# Altium PCB ROBOTPCB.PcbDoc
Units mm, origin at the board's own origin, x right, y up, seen from the top; angles counter-clockwise.
Board outline 178.3 x 103.75 mm, 2 copper layers (Top Layer, Bottom Layer); 68 components, 56 nets, 292 pads, 71 vias.
Unrouted connection lines stored in the file: 24.
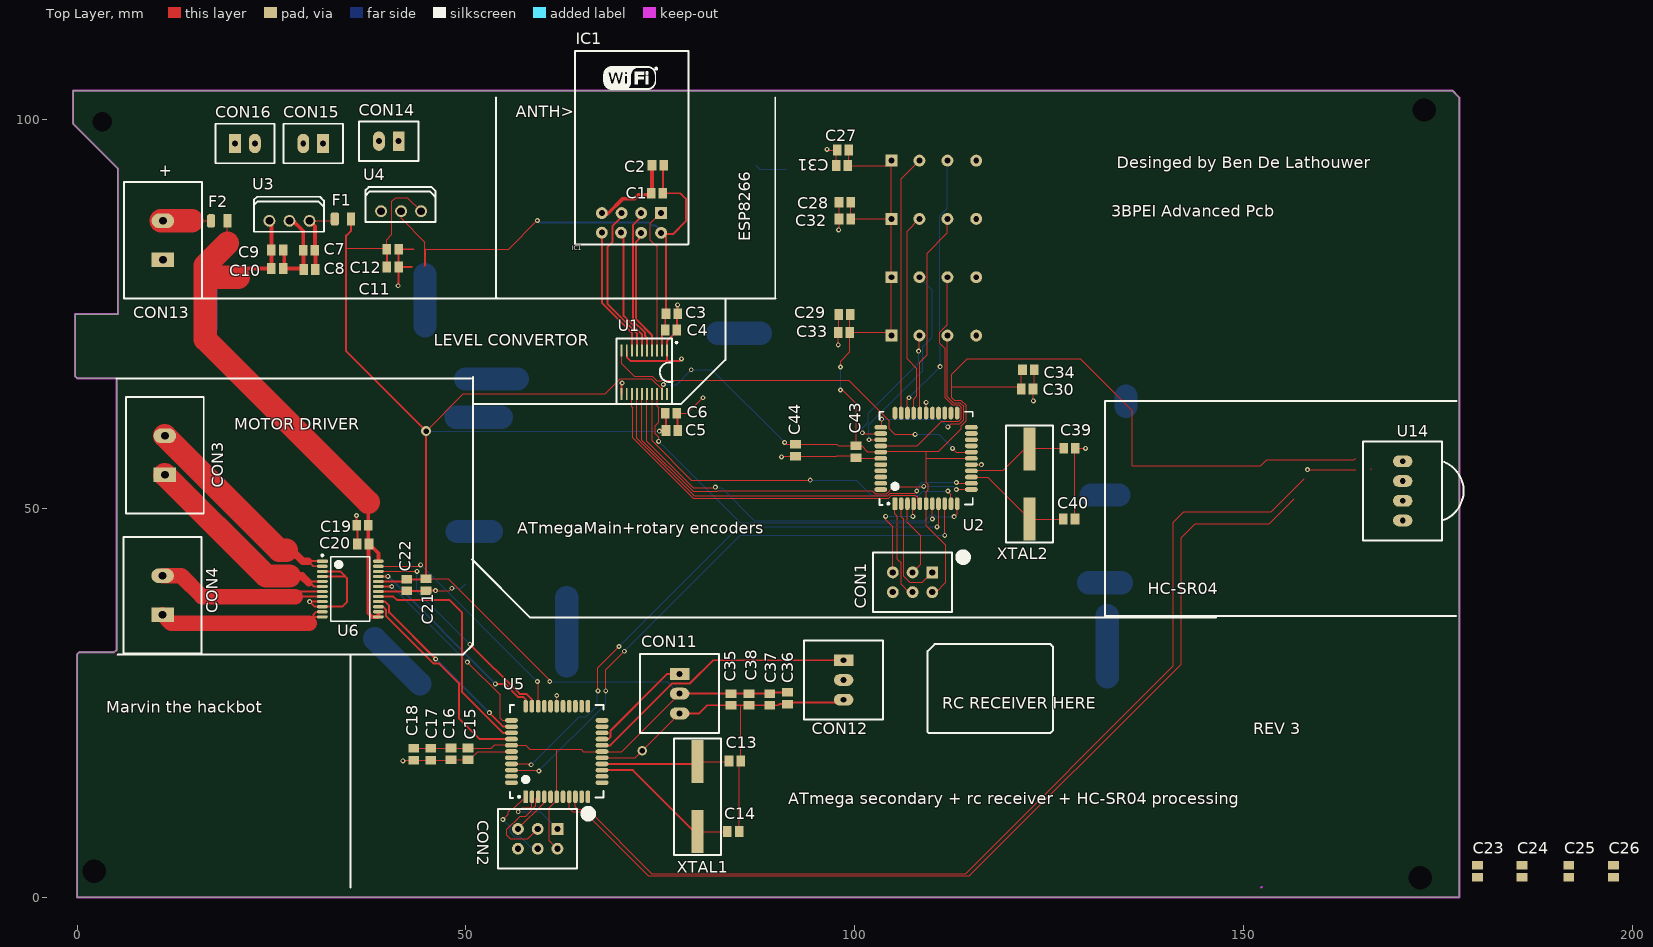
[diagram p0: Top Layer view]
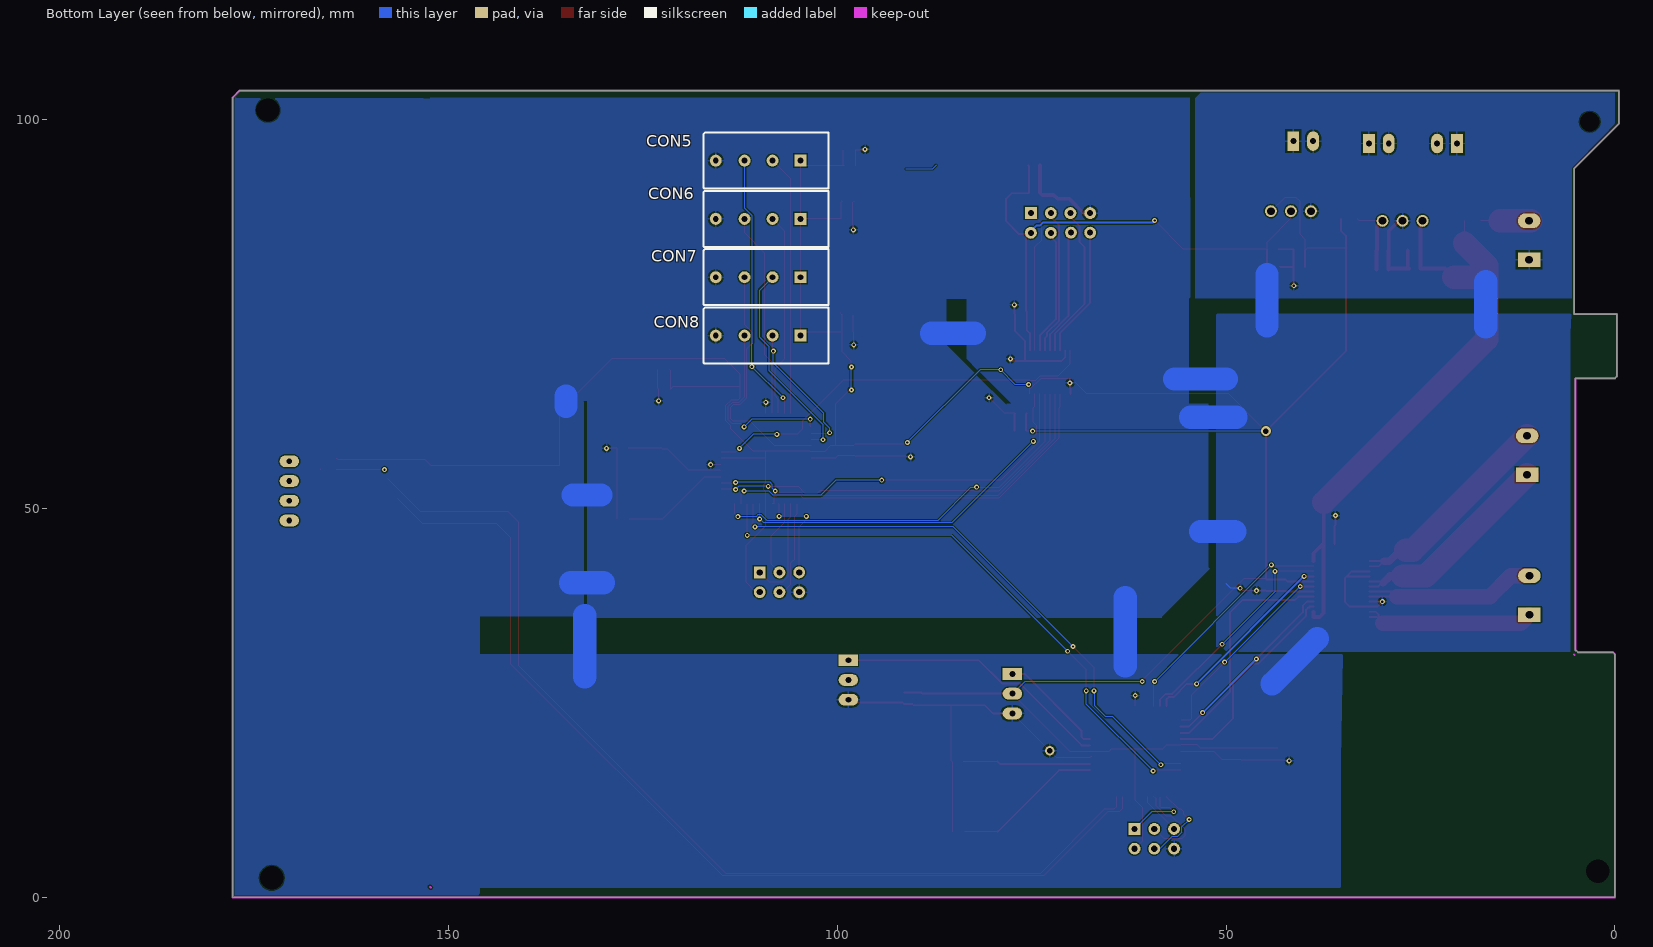
[diagram p1: Bottom Layer view, seen from below]

## Layer stack, top to bottom
Top Solder: solder mask 0.0102, Solder Resist, Dk 3.5
Top Layer: signal copper 0.0356
Dielectric 1: dielectric 0.32, FR-4, Dk 4.8
Bottom Layer: signal copper 0.0356
Bottom Solder: solder mask 0.0102, Solder Resist, Dk 3.5

## Board outline
0,0 0,31.25 0.25,31.5 4.75,31.5 5.1,31.85 5.1,66.75 0,66.75 -0.25,67 -0.25,75 5.25,75 5.25,93.75 -0.5,99.5 -0.5,103.75 176.9,103.75 177.8,102.85 177.8,0

## Design rules (kind name [scope] priority, off if disabled: settings)
AssemblyTestPointUsage SilkToBoardRegionClearance_1 [All] p2:
Clearance [All] p1: gap=0.152 ignorepadtopadclearanceinfootprint=FALSE except(0: Arc-Hole Track-Hole SMDPad-Hole THPad-Hole Via-Hole Fill-Hole Poly-Hole Region-Hole Text-Hole)
MatchedLengths DiffPair_DIFF100MatchedLengths [InDifferentialPairClass('DIFF100')] p1: tolerance=0.152 checknetsindiffpair=TRUE checkdiffpairvsdiffpair=FALSE checkxsignals=FALSE checkothers=FALSE
MinimumSolderMaskSliver SilkscreenOverComponentPads_1 [All] p2: minsoldermaskwidth=0.254
MinimumSolderMaskSliver SilkToSolderMaskClearance [IsPad] p3: minsoldermaskwidth=0.254
MinimumSolderMaskSliver SilkscreenOverComponentPads [All] p4: minsoldermaskwidth=0.254
PolygonConnect [All] p1: connectstyle=Relief reliefconductorwidth=0.254 reliefentries=4 polygonreliefangle="90 Angle" airgapwidth=0.254
RoutingVias [All] p1: holewidth=0.305 width=0.635 viastyle="Through Hole" minholewidth=0.305 minwidth=0.635 maxholewidth=0.711 maxwidth=1.27
SilkToSolderMaskClearance SilkToSolderMaskClearance_1 [IsPad] p1: minsilkscreentomaskgap=0.254 clearancetoexposedcopper=TRUE
SolderMaskExpansion [All] p1: expansion=0.102
Width [All] p1: maxlimit=5 minlimit=0.152 preferedwidth=0.254
29 further rules are at their usual default settings.

## Classes and differential pairs
component class U_Voeding: C7 C8 C9 C10 C11 C12 C15 C16 CON13 CON14 CON15 CON16 F1 F2 U3 U4
component class U_motordriver: C17 C18 C19 C20 U6
component class U_LevelShifter: C3 C4 C5 C6 U1
component class U_ESP8266: C1 C2 IC1
component class "U_RC reciever": C31 C32 C33 C34 CON11 CON12
component class "U_Atmega secondary": C13 C14 C27 C28 C29 C30 CON2 U5 XTAL1
component class U_ATmegaMain: C35 C36 C39 C40 C43 C44 CON1 U2 XTAL2
component class Top: CON3 CON4
component class "U_ultrasoon sensor": C37 C38 U14
component class U_encoder: C21 C22 C23 C24 C25 C26 CON5 CON6 CON7 CON8

## Components (designator, comment, footprint, x,y, rotation, side; value= is the part's Value field where it differs from the comment)
C1 "Cap Pol3" C0805 74.6,90.55 r180 top
C2 "Cap Pol3" C0805 74.7,94.15 r180 top
C3 "Cap Pol3" C0805 76.5,75.05 r0 top
C4 "Cap Pol3" C0805 76.4,72.95 r0 top
C5 "Cap Pol3" C0805 76.5,60.05 r0 top
C6 "Cap Pol3" C0805 76.4,62.25 r0 top
C7 "Cap Pol3" C0805 29.85,83.225 r180 top
C8 "Cap Pol3" C0805 29.9,80.75 r180 top
C9 "Cap Pol3" C0805 25.75,83.25 r0 top
C10 "Cap Pol3" C0805 25.75,80.85 r0 top
C11 "Cap Pol3" C0805 40.6,83.35 r0 top
C12 "Cap Pol3" C0805 40.6,81.05 r0 top
C13 "Cap Pol3" C0805 84.6,17.55 r0 top
C14 "Cap Pol3" C0805 84.4,8.45 r0 top
C15 "Cap Pol3" C0805 50.3,18.45 r270 top
C16 "Cap Pol3" C0805 48.1,18.45 r270 top
C17 "Cap Pol3" C0805 45.5,18.4 r270 top
C18 "Cap Pol3" C0805 43.3,18.4 r270 top
C19 "Cap Pol3" C0805 36.7,47.85 r180 top
C20 "Cap Pol3" C0805 36.8,45.45 r180 top
C21 "Cap Pol3" C0805 44.9,40.2 r270 top
C22 "Cap Pol3" C0805 42.4,40.15 r270 top
C23 "Cap Pol3" C0805 180.099,3.349 r90 top
C24 "Cap Pol3" C0805 185.849,3.349 r90 top
C25 "Cap Pol3" C0805 191.849,3.349 r90 top
C26 "Cap Pol3" C0805 197.599,3.349 r90 top
C27 "Cap Pol3" C0805 98.5,96.1 r180 top
C28 "Cap Pol3" C0805 98.75,89.4 r180 top
C29 "Cap Pol3" C0805 98.7,74.95 r180 top
C30 "Cap Pol3" C0805 122.2,65.35 r0 top
C31 "Cap Pol3" C0805 98.4,94.1 r180 top
C32 "Cap Pol3" C0805 98.75,87.25 r180 top
C33 "Cap Pol3" C0805 98.65,72.65 r180 top
C34 "Cap Pol3" C0805 122.35,67.85 r0 top
C35 "Cap Pol3" C0805 84.1,25.45 r270 top
C36 "Cap Pol3" C0805 91.4,25.6 r270 top
C37 "Cap Pol3" C0805 89.1,25.45 r270 top
C38 "Cap Pol3" C0805 86.4,25.45 r270 top
C39 "Cap Pol3" C0805 127.65,57.75 r0 top
C40 "Cap Pol3" C0805 127.6,48.65 r0 top
C43 "Cap Pol3" C0805 100.2,57.3 r270 top
C44 "Cap Pol3" C0805 92.4,57.5 r270 top
CON1 "ISP Programming header" "ISP PROGRAMMING HEADER" 107.46,40.52 r180 top
CON2 "ISP Programming header" "ISP PROGRAMMING HEADER" 59.25,7.52 r180 top
CON3 "Schrew terminal" ScrewTerminal 11.3,56.85 r90 top
CON4 "Schrew terminal" ScrewTerminal 11,38.85 r90 top
CON5 "Encoder" ENCODER 104.75,94.75 r0 bottom
CON6 "Encoder" ENCODER 104.75,87.25 r0 bottom
CON7 "Encoder" ENCODER 104.75,79.75 r0 bottom
CON8 "Encoder" ENCODER 104.75,72.25 r0 bottom
CON11 "RCcon" RcCon 77.5,26.19 r270 top
CON12 "RCcon" RcCon 98.6,27.95 r270 top
CON13 "Schrew terminal" ScrewTerminal 11.05,84.5 r90 top
CON14 "2PinsHeader" 2PinsHeader 40.1,97.25 r180 top
CON15 "2PinsHeader" 2PinsHeader 30.37,96.95 r180 top
CON16 "2PinsHeader" 2PinsHeader 21.6,96.95 r0 top
F1 "fuse" Fuse 33.15,87.25 r0 top
F2 "fuse" Fuse 17.25,87 r0 top
IC1 "ESP8266 ESP-01" "ESP8266 ESP-01" 71.31,86.743 r0 top
U1 "TXb0108" TXB0108 75.9,70.35 r180 top
U2 "ATmega162" ATmga162 109.2,56.45 r90 top
U3 "LM78xx" LM78xx 24.15,87.9 r0 top
U4 "LD1117V33" LD117vxx 39.1,88.25 r0 top
U5 "ATmega162" ATmga162 61.7,18.75 r90 top
U6 "TB6612FGN" TBS6612FNG 35.15,39.65 r0 top
U14 "HC-SR04" ULTRASOONSENSOR 170.5,56.08 r270 top
XTAL1 "Crystal" Crystal 79.8,12.95 r270 top
XTAL2 "Crystal" Crystal 122.5,53.15 r270 top

## Footprints (in the part's own frame and the unit in brackets; to place one, negate y for a bottom-side part, rotate by r counter-clockwise, add the part's x,y. Pads: shape width x height; smd on the part's side, far side on the other; paste and mask are expansions set on the pad)
2PinsHeader [mil]
  rect 60x98.43 hole 30: 1(-50,0)
  oval 60x98.43 hole 30: 2(50,0)
  silkscreen extent -150,-100 150,100, body extent -101,-50 99,50, height 237
ATmga162 [mm] "ATmga162 TQPF"
  rrect50% 1.65x0.6 smd: 1(-5.825,4)
  oval 1.65x0.6 smd: 2(-5.825,3.2) 3(-5.825,2.4) 4(-5.825,1.6) 5(-5.825,0.8) 6(-5.825,0) 7(-5.825,-0.8) 8(-5.825,-1.6) 9(-5.825,-2.4) 10(-5.825,-3.2) 11(-5.825,-4) 23(5.825,-4) 24(5.825,-3.2) 25(5.825,-2.4) 26(5.825,-1.6) 27(5.825,-0.8) 28(5.825,0) 29(5.825,0.8) 30(5.825,1.6) 31(5.825,2.4) 32(5.825,3.2) 33(5.825,4)
  oval 0.6x1.65 smd: 12(-4,-5.825) 13(-3.2,-5.825) 14(-2.4,-5.825) 15(-1.6,-5.825) 16(-0.8,-5.825) 17(0,-5.825) 18(0.8,-5.825) 19(1.6,-5.825) 20(2.4,-5.825) 21(3.2,-5.825) 22(4,-5.825) 34(4,5.825) 35(3.2,5.825) 36(2.4,5.825) 37(1.6,5.825) 38(0.8,5.825) 39(0,5.825) 40(-0.8,5.825) 41(-1.6,5.825) 42(-2.4,5.825) 43(-3.2,5.825) 44(-4,5.825)
  silkscreen extent -6,-6 6,6, body extent -6,-6 6,6, height 1.1
C0805 [mm] "Chip Capacitor, Body 2.0x1.3mm, IPC High Density"
  rect 1.1x1.4 smd: 1(-0.75,0) 2(0.75,0)
  body extent -1.1,-0.72 1.1,0.72, height 1.4
Crystal [mm]
  rect 5.5x1.5 smd: 1(-4.5,0) 2(4.5,0)
  silkscreen extent -7.5,-3 7.5,3, body extent -6.35,-2.15 6.35,2.55, height 4.2
ENCODER [mil]
  rect 60x60 hole 30: 1(0,0)
  round 60 hole 30: 2(141.73,0) 3(283.46,0) 4(429.13,0)
  silkscreen extent -142,-142 492,142, body extent -12,-12 441,20, height 118
"ESP8266 ESP-01" [mil] "ESP8266 ESP-01"
  rect 60x60 hole 30: 1(149,50.5)
  round 60 hole 30: 2(150,-50.5) 3(49,49.5) 4(49,-50.5) 5(-50,49.5) 6(-53,-49.5) 7(-150,49.5) 8(-150,-49.5)
  silkscreen extent -287,-110 288,870, body extent -285,-105 285,871, height 231
Fuse [mm]
  rrect50% 1.05x1.7 smd: 1(0,0)
  rect 1.05x1.7 smd: 2(2.1,0)
  body extent -0.52,-0.8 2.73,0.8, height 0.5
"ISP PROGRAMMING HEADER" [mil]
  rect 60x60 hole 31.5: 1(-100,-50)
  round 60 hole 31.5: 2(-100,50) 3(0,-50) 4(0,50) 5(100,-50) 6(100,50)
  silkscreen extent -200,-150 200,150, body extent -150,-100 150,100, height 315
LD117vxx [mil] "TO-220"
  round 60 hole 38.98: 1(0,0) 2(101.38,0) 3(202.76,0)
  silkscreen extent -79,-55 276,122, body extent -99,-55 301,125, height 769
LM78xx [mm]
  round 1.524 hole 0.99: 1(0.6,-0.9) 2(3.175,-0.9) 3(5.75,-0.9)
  silkscreen extent -1.4,-2.3 7.6,2.2, body extent -1.91,-2.3 8.25,2.27, height 19.54
RcCon [mil]
  rect 60x98.43 hole 30: 1(-100,0)
  oval 60x98.43 hole 30: 2(0,0) 3(100,0)
  silkscreen extent -200,-200 200,200, body extent -150,-48 150,52, height 374
ScrewTerminal [mm]
  rect 1.9x2.9 hole 1: 1(-2.5,0)
  oval 1.9x2.9 hole 1: 2(2.5,0)
  silkscreen extent -7.5,-5 7.5,5, body extent -4.96,-4.41 5.04,4.59, height 15.3
TBS6612FNG [mm] "TBS6612FNG SSOP"
  rrect50% 1.4x0.4 smd: 1(-3.6,3.575)
  oval 1.4x0.4 smd: 2(-3.6,2.925) 3(-3.6,2.275) 4(-3.6,1.625) 5(-3.6,0.975) 6(-3.6,0.325) 7(-3.6,-0.325) 8(-3.6,-0.975) 9(-3.6,-1.625) 10(-3.6,-2.275) 11(-3.6,-2.925) 12(-3.6,-3.575) 13(3.6,-3.575) 14(3.6,-2.925) 15(3.6,-2.275) 16(3.6,-1.625) 17(3.6,-0.975) 18(3.6,-0.325) 19(3.6,0.325) 20(3.6,0.975) 21(3.6,1.625) 22(3.6,2.275) 23(3.6,2.925) 24(3.6,3.575)
  silkscreen extent -3.72,-4.15 2.5,4.45, body extent -4.05,-4.31 3.85,4.32, height 1.98
TXB0108 [mm] "TSSOP"
  rrect50% 0.25x1.55 smd: 1(0,0)
  rect 0.25x1.55 smd: 2(0.65,0) 3(1.3,0) 4(1.95,0) 5(2.6,0) 6(3.25,0) 7(3.9,0) 8(4.55,0) 9(5.2,0) 10(5.85,0) 11(5.85,5.6) 12(5.2,5.6) 13(4.55,5.6) 14(3.9,5.6) 15(3.25,5.6) 16(2.6,5.6) 17(1.95,5.6) 18(1.3,5.6) 19(0.65,5.6) 20(0,5.6)
  silkscreen extent -1.3,-1.55 6.5,6.9, body extent -0.37,-0.47 6.23,6.08, height 1.2
ULTRASOONSENSOR [mil]
  oval 60x98.43 hole 30: 1(0,0) 2(100,0) 3(200,0)
  oval 59.06x98.43 hole 30: 4(300,0)
  silkscreen extent -100,-200 400,308, body extent -20,-20 320,20, height 118

## Part data
C1 C2 C3 C4 C5 C6 C7 C8 C9 C10 C11 C12 C13 C14 C15 C16 C17 C18 C19 C20 C21 C22 C23 C24 C25 C26 C27 C28 C29 C30 C31 C32 C33 C34 C35 C36 C37 C38 C39 C40 C43 C44: "Polarized Capacitor (Surface Mount)"
CON11 CON12: library part "Rc con"
F1 F2: library part Component_1, "fuse ptc"

## Free pads (board coordinates)
  round 1.524 hole 2.5: 3(3.25,99.75)
  round 1.524 hole 3: 4(2.2,3.35) 5(172.75,2.5) 7(173.25,101.25)

## Via types
v1: diameter 0.635, hole 0.305, Top Layer to Bottom Layer, 69 vias
v2: diameter 1.27, hole 0.711, Top Layer to Bottom Layer, 2 vias

## Nets (pads, with @x,y where several pads share a name; then routed paths per layer and width w, separated by ;. In a path a pad name is that pad's centre, name@x,y a point inside that pad or via, vN(x,y) a via of type N, cw(c..) or ccw(c..) an arc to the next point about the centre after c; other vN are vias at no path point)
+3.3V: C1.1 C2.1 C3.1 C4.1 C15.1 C16.1 IC1.2 U1.2 U4.2 | length 70
  Top Layer w0.152: U4.2 41.675,87.325 44.75,84.25 44.75,83.35 55.5,83.35 v1(59.2,87.05) ; 44.65,81.15 44.75,81.25
  Top Layer w0.25: 44.75,81.25 44.75,83.35 ; U1.2 75.25,72.55 C4.1 75.65,75.35 75.75,75.45 75.75,85.025 75.465,85.31 76.66,85.31 78.3,86.95 78.3,89.85 77.6,90.55 C1.1 75.35,94.05 C2.1
  Bottom Layer w0.25: v1(59.2,87.05) 59.439,86.811 73.539,86.811 73.925,86.425 74.35,86.425 IC1.2@75.465,85.31
+5V: C5.1 C6.1 C11.1 C12.1 C19.1 C20.1 C21.1 C22.1 C23.1 C24.1 C25.1 C26.1 C27.1 C28.1 C29.1 C30.1 C31.1 C32.1 C33.1 C34.1 C35.1 C36.1 C37.1 C38.1 C43.1 C44.1 CON1.2 CON2.2 CON5.1 CON6.1 CON7.1 CON8.1 CON11.2 F1.2 U1.19 U2.6 U2.17 U2.38 U4.3 U5.6 U5.17 U5.38 U6.20 | length 465
  Top Layer w0.152: 34.6,83.5 39.6,83.5 C11.1@39.85,83.25 ; C11.1 39.85,84.6 40.5,85.25 40.5,89.5 41,90 42.5,90 U4.3 ; 43.3,19.15 48.05,19.15 48.1,19.2 53.25,19.2 53.7,19.65 55.775,19.65 U5.38 57.7,19.55 58.195,19.055 61.7,19.055 ; C21.1 47.772,40.95 60.8,27.922 v1(60.8,27.75) ; v2(44.9,59.95) 49.7,64.75 67.928,64.75 69.874,66.696 73.877,66.696 U1.19@75.25,65.323 ; CON2.2 60.75,7.29 60.75,11.502 61.7,12.452 U5.6 61.7,19.055 ; v1(74.9,59.95) 75.65,59.95 C5.1 ; U1.19 U1.19@75.25,65.323 ; v1(75.4,65.95) 75.25,65.8 U1.19@75.25,65.323 ; CON11.2 70.06,18.75 U5.17 65.131,18.75 64.826,19.055 61.7,19.055 ; v1(91,58.5) 91.25,58.25 C44.1 97.65,58.25 97.7,58.3 97.95,58.05 C43.1 ; v1(98.2,65.25) 98.4,65.25 100.2,63.45 C43.1 ; v1(98.2,68.2) 98.2,68.95 99.4,70.15 C33.1 ; C27.1 99.25,94.2 C31.1 104.1,94.1 CON5.1 CON6.1 CON7.1 CON8.1 104.35,72.65 C33.1 ; C28.1@99.45,89.65 99.35,89.55 C28.1 C32.1 CON6.1@104.4,87.25 ; C29.1@99.65,75.15 C29.1 99.4,74.9 C33.1 ; CON1.2 110.5,39.25 111.75,40.5 111.75,45.25 109.2,47.8 U2.6 109.2,52.178 109.446,52.424 109.446,53.076 109.2,53.322 109.2,56.45 ; U2.17 109.2,56.45 ; C34.1 121.45,67.7 C30.1 121.15,65.65 112.5,65.65 ; 164.45,56.5 164.2,56.25 153,56.25 152.25,55.5 135.7,55.5 135.7,62.55 129.009,69.241 115.843,69.241 115.853,69.25 114.5,69.25 112.5,67.25 112.5,65.65 ; C43.1 100.9,58.05 101.621,57.329 103.375,57.329 U2.38 103.475,57.35 109.9,57.35 ; 109.2,56.45 109.2,57.35 109.9,57.35 ; 109.9,57.35 110.8,57.35 113.729,60.279 113.729,60.669 114.338,61.279 114.338,63.271 113.668,63.942 112.806,63.942 112.5,64.248 112.5,65.65
  Top Layer w0.25: F1.2 35.25,85.75 34.6,85.1 34.6,83.5 34.6,70.25 v2(44.9,59.95) C21.1 44.85,40.9 C22.1 42.125,40.625 U6.20 ; C12.1 C11.1@39.85,83.25 ; C6.1 75.75,62.15 C5.1 ; CON11.2 84.09,26.19 C35.1 C38.1 C37.1 89.25,26.35 C36.1
  Bottom Layer w0.152: v2(44.9,59.95) v1(74.9,59.95) ; v1(60.8,27.75) 75.94,27.75 CON11.2 ; v1(75.4,65.95) 77.1,65.95 v1(79,67.85) 81.65,67.85 v1(91,58.5) ; v1(98.2,65.25) v1(98.2,68.2)
GND: C1.2 C2.2 C3.2 C4.2 C5.2 C6.2 C7.2 C8.2 C9.2 C10.2 C11.2 C12.2 C13.2 C14.2 C15.2 C16.2 C17.2 C18.2 C19.2 C20.2 C21.2 C22.2 C23.2 C24.2 C25.2 C26.2 C27.2 C28.2 C29.2 C30.2 C31.2 C32.2 C33.2 C34.2 C35.2 C36.2 C37.2 C38.2 C39.2 C40.2 C43.2 C44.2 CON1.6 CON2.6 CON5.4 CON6.4 CON7.4 CON8.4 CON11.3 CON12.3 CON13.1 CON14.1 CON14.2 CON15.1 CON15.2 CON16.1 CON16.2 IC1.7 U1.1 U1.9 U1.11 U2.16 U2.28 U2.39 U3.2 U4.1 U5.16 U5.28 U5.39 U6.3 U6.4 U6.9 U6.10 U6.18 | length 263.6
  Top Layer w0.152: v1(41.3,78.65) v1@41.35,78.7 ; v1(41.9,17.55) 42,17.65 C18.2 C17.2 48.05,17.65 C16.2 C15.2 50.507,17.7 51.557,18.75 U5.39 ; 43.05,81.05 43.15,81.15 ; v1(46.1,39.45) 47.9,39.45 v1(48.2,39.75) ; U5.28 v1(61.7,25.95) ; U5.16@67.325,18.15 U5.16 71.8,17.95 CON11.3 ; 70.05,65.8 70.05,66.1 v1(70.1,66.15) ; 75.9,69.1 76,69 ; C6.2 78.5,62.25 v1(80.5,64.25) ; C14.2 85.15,17.35 C13.2 85.35,24.6 85.25,24.7 ; v1(90.6,56.65) 90.7,56.75 C44.2 97.65,56.75 97.7,56.8 99.95,56.8 C43.2 100.3,56.45 U2.39 ; v1(96.45,96.2) 96.55,96.1 C27.2 97.65,96 C31.2 ; C28.2@97.85,89.55 C28.2 C32.2 98,85.9 v1(97.95,85.85) ; v1(97.9,71.05) C33.2 97.95,72.7 C29.2 ; U2.28 v1(109.2,63.65) ; U2.16 v1(116.3,55.65) ; v1(123,63.85) 122.95,63.9 C30.2 123.1,65.5 C34.2 ; C40.2 128.35,57.7 C39.2 v1(129.7,57.75)
  Top Layer w0.25: U6.9 v1(29.925,38.025) 30.575,37.375 U6.10 34.125,37.375 34.7,37.95 34.7,41.05 34.475,41.275 ; U6.4 34.475,41.275 ; U6.3 33.825,41.925 34.475,41.275 ; v1(35.95,49.1) C19.2 36.05,47.75 C20.2 ; U6.18 42.325,39.325 C22.2 44.85,39.4 C21.2 v1(46.1,39.45) ; v1@41.35,78.7 C12.2 ; 43.05,81.05 C12.2 ; 43.25,83.35 C11.2 C12.2 ; U1.11 70.05,65.8 ; U1.9 70.7,69.45 71.15,69 76,69 77.5,69 v1(77.75,69.25) ; 75.9,69.1 U1.1 75.9,71.558 77.15,72.808 C4.2 77.15,74.95 C3.2 v1(77.25,76.2) ; C6.2 77.25,62.15 C5.2 ; CON11.3 80,23.65 81.05,24.7 C35.2 85.25,24.7 C38.2 C37.2 90.2,24.7 90.35,24.85 C36.2 91.6,25.05 98.24,25.05 CON12.3
  Top Layer w0.5: C9.2@26.65,83.225 26.65,81 C10.2 29.05,80.85 C8.2 29.15,83.175 C7.2 29.1,85.675 U3.2@27.65,87.125 ; IC1.7@67.845,87.85 68.2,87.85 70.2,89.85 71.7,89.85 72.2,90.35 73.65,90.35 C1.2 73.95,90.65 C2.2
  Bottom Layer w0.152: v1(48.2,39.75) 49.4,39.75 50,40.35
  Bottom Layer w3: 16.6,73.35 16.6,79.15 ; 38.3,33.25 44.1,27.45 ; 44.75,73.5 44.75,80.1 ; 48.75,61.75 54.55,61.75 ; 48.9,47.05 53.3,47.05 ; 50,66.65 56.6,66.65 ; 63,29.75 63,38.55 ; 82.4,72.55 87.9,72.55 ; 130.1,40.45 134.3,40.45 ; 130.4,51.75 134,51.75 ; 132.5,28.35 132.5,36.25 ; 134.9,63.15 134.9,64.45
  other v2: 72.7,18.85
MISO: CON2.1 U5.2 | length 9.2
  Top Layer w0.152: v1(56.75,11) 57.25,11.5 58.341,11.5 58.5,11.659 U5.2
  Bottom Layer w0.152: v1(56.75,11) 59.58,11 CON2.1
MISO1: CON1.1 U2.2 | length 14
  Top Layer w0.152: U2.2 106,48.953 106.305,48.649 106.305,41.32 107.125,40.5 108.71,40.5 CON1.1
MOSI: CON2.4 U5.1 | length 10.7
  Top Layer w0.152: v1(54.775,10) 55.454,10.679 55.454,10.976 55.774,11.296 56.071,11.296 U5.1
  Bottom Layer w0.152: v1(54.775,10) 55.719,9.056 55.719,8.38 56.3,7.799 56.976,7.799 58.525,6.25 CON2.4
MOSI1: CON1.4 U2.1 | length 12.6
  Top Layer w0.152: U2.1 105.2,49.3 105.5,49 105.5,43.5 106,43 106,40.25 107,39.25 CON1.4
NetC7_1: C7.1 C8.1 F1.1 U3.3 | length 9.9
  Top Layer w0.152: U3.3 32.9,87 F1.1 ; C7.1 C7.1@30.65,83.175
  Top Layer w0.5: U3.3 30.6,86.3 C7.1 ; C8.1 C7.1@30.65,83.175
NetCON3_1: CON3.1 U6.5 U6.6 | length 28
  Top Layer w0.25: U6.6 30.475,39.975 30,40.45 29.8,40.45 29.975,40.625 U6.5
  Top Layer w1: 27.3,41.327 28.923,41.327 29.8,40.45
  Top Layer w3: CON3.1 24.323,41.327 27.3,41.327
NetCON3_2: CON3.2 U6.1 U6.2 | length 29.3
  Top Layer w0.25: U6.2 30.375,42.575 29.725,43.225 U6.1
  Top Layer w1: 26.9,44.65 27.2,44.95 27.3,44.95 29.025,43.225 29.725,43.225
  Top Layer w3: CON3.2 26,44.65 26.9,44.65
NetCON4_1: CON4.1 U6.11 U6.12 | length 23.2
  Top Layer w0.25: 29.85,35.25 30.4,35.8 ; U6.12 30.675,36.075 30.4,35.8 ; U6.11 30.775,36.725 30.4,36.35 30.4,35.8
  Top Layer w2: CON4.1 12.1,35.25 29.85,35.25
NetCON4_2: CON4.2 U6.7 U6.8 | length 25.4
  Top Layer w0.25: U6.8 28.075,38.675 28.725,39.325 U6.7
  Top Layer w2: CON4.2 13.4,41.35 16.075,38.675 28.075,38.675
NetCON5_2: CON5.2 U2.32 | length 33.4
  Top Layer w0.152: U2.32 106,92.4 CON5.2
NetCON5_3: CON5.3 U2.31 | length 34.6
  Top Layer w0.152: U2.31 106.8,64.05 v1(107,64.25)
  Bottom Layer w0.152: v1(107,64.25) v1(111,68.25) 111,71.219 110.959,71.259 110.959,87.66 111.95,88.651 CON5.3
NetCON6_2: CON6.2 U2.30 | length 26.3
  Top Layer w0.152: U2.30 107.6,64.078 108,64.478 108,68 106.75,69.25 106.75,85.65 CON6.2
NetCON6_3: CON6.3 U2.29 | length 26.4
  Top Layer w0.152: U2.29 108.4,68.809 109.341,69.75 109.341,82.841 111.95,85.45 CON6.3
NetCON7_2: CON7.2 U2.36 | length 26.5
  Top Layer w0.152: v1(101.85,58.85) U2.36
  Bottom Layer w0.152: v1(101.85,58.85) 101.85,60.769 108.796,67.715 108.796,70.476 108.788,70.484 108.788,70.788 110,72 110,78.1 CON7.2
NetCON7_3: CON7.3 U2.37 | length 32.1
  Top Layer w0.152: U2.37 108.05,58.05 111.221,61.221 113.419,61.221 113.729,61.531 113.729,63.019 113.419,63.329 112.557,63.329 111.645,64.24 111.645,70.574 110.959,71.259 110.959,72.66 111.95,73.651 CON7.3
NetCON8_2: CON8.2 U2.35 | length 18
  Top Layer w0.152: v1(101,59.75) 101.1,59.65 U2.35 ; v1(108.25,70.25) 108.35,70.35 CON8.2
  Bottom Layer w0.152: v1(101,59.75) 101,60.35 101.75,61.1 101.75,62.25 108.25,68.75 v1(108.25,70.25)
NetCON8_3: CON8.3 U2.34 | length 24.6
  Top Layer w0.152: U2.34 103.5,60.575 v1(103.5,61.5) ; CON8.3 111.95,64.366 112.683,63.633 113.545,63.633 114.033,63.145 114.033,61.405 113.545,60.917 112.417,60.917 v1(112,60.5)
  Bottom Layer w0.152: v1(103.5,61.5) 111,61.5 v1(112,60.5)
NetCON11_1: CON11.1 U5.19 | length 13.9
  Top Layer w0.25: U5.19 68.3,20.35 68.627,20.677 68.627,21.452 75.905,28.73 CON11.1
NetCON12_1: CON12.1 U5.18 | length 35.6
  Top Layer w0.25: U5.18 68.6,19.55 76.55,27.5 78.837,27.5 81.827,30.49 CON12.1
NetCON13_2: CON13.2 F2.1 | length 6.4
  Top Layer w0.152: 14.75,87 F2.1
  Top Layer w3: CON13.2@10.8,87 CON13.2 14.75,87
NetIC1_1: IC1.1 U1.3 | length 18.6
  Top Layer w0.152: U1.3 74.6,83.65 73.75,84.5 73.75,86.681 IC1.1
NetIC1_3: IC1.3 U1.5 | length 18.8
  Top Layer w0.25: IC1.3 72.555,87.505 71.5,86.45 71.5,74.157 73.052,72.605 73.052,72.198 73.3,71.95 U1.5
NetIC1_4: IC1.4 U1.4 | length 16.2
  Top Layer w0.25: IC1.4@72.9,85.31 71.902,84.312 71.902,74.324 73.95,72.276 U1.4
NetIC1_5: IC1.5 U1.7 | length 19.9
  Top Layer w0.25: IC1.5 70.04,87.505 68.885,86.349 68.885,84.296 68.248,83.659 68.248,76.271 72,72.519 U1.7
NetIC1_6: IC1.6 U1.6 | length 16
  Top Layer w0.25: IC1.6@70.309,85.335 70.309,74.779 72.65,72.438 U1.6
NetIC1_8: IC1.8 U1.8 | length 16.7
  Top Layer w0.25: IC1.8@67.845,85.335 67.5,84.99 67.5,76.45 71.35,72.6 U1.8
NetU1_10: U1.10 U2.18 | length 52.1
  Top Layer w0.152: U1.10 70.05,68.6 71.649,67.001 74.003,67.001 74.554,66.45 75.128,66.45 75.174,66.496 99.276,66.496 104.454,61.318 104.454,60.274 105.178,59.55 v1(107.8,59.55) ; v1(112.6,57.75) 113.1,57.25 U2.18
  Bottom Layer w0.152: v1(107.8,59.55) 110.8,59.55 v1(112.6,57.75)
NetU1_13: U1.13 U2.7 | length 47
  Top Layer w0.152: U1.13 71.35,63.1 71.5,62.95 71.5,59.085 79.273,51.312 104.371,51.312 104.738,51.679 107.819,51.679 107.894,51.604 108.129,51.604 108.129,50.625 108.4,50.625
NetU1_14: U1.14 U2.10 | length 52.9
  Top Layer w0.152: U1.14 72,59.016 79.399,51.617 104.245,51.617 104.612,51.983 107.733,51.983 v1(108,52.25) ; v1(113.1,53.35) 113.2,53.25 115.025,53.25
  Bottom Layer w0.152: v1(108,52.25) 108.354,52.604 108.354,52.623 ; 108.354,52.624 108.354,53.076 108.674,53.396 113.054,53.396 v1(113.1,53.35)
NetU1_15: U1.15 U2.11 | length 51.8
  Top Layer w0.152: U1.15 72.65,58.797 79.243,52.204 82.326,52.204 82.41,52.288 102.264,52.288 102.631,51.921 104.119,51.921 104.993,52.796 108.846,52.796 v1(108.9,52.85) ; v1(113.1,52.45) 115.025,52.45
  Bottom Layer w0.152: v1(108.9,52.85) 112.7,52.85 v1(113.1,52.45)
NetU1_16: U1.16 U2.12 | length 52.2
  Top Layer w0.152: U1.16 73.254,64.704 73.254,58.624 79.228,52.65 82,52.65 v1(82.1,52.75) ; v1(112.8,48.95) 113.2,49.35 113.2,50.625
  Bottom Layer w0.152: v1(82.1,52.75) 82.2,52.65 82.9,52.65 87.096,48.454 109.032,48.454 109.774,49.196 110.226,49.196 110.472,48.95 v1(112.8,48.95)
NetU1_17: U1.17 U2.13 | length 49
  Top Layer w0.152: U1.17 73.95,58.7 79,53.65 v1(94.3,53.65) ; v1(112,52.25) 112.4,51.85 112.4,50.625
  Bottom Layer w0.152: v1(94.3,53.65) 100.2,53.65 102.146,51.704 108.226,51.704 108.772,52.25 v1(112,52.25)
NetU1_18: U1.18 U2.5 | length 48.5
  Top Layer w0.152: U1.18 74.6,63.15 74.8,62.95 74.8,61.122 74.354,60.676 74.354,59.596 74.8,59.15 v1(74.8,58.65) v1@75,58.65 ; v1(110,48.65) 110,50.625
  Bottom Layer w0.152: v1(74.8,58.65) 85.301,48.149 109.499,48.149 v1(110,48.65)
NetU2_8: U2.8 U5.41 | length 73.3
  Top Layer w0.152: U5.41 58.3,17.15 v1(58.4,17.05) ; v1(67,26.55) 67,29.55 v1(69.7,32.25) ; v1(110.6,47.65) 110.8,47.85 U2.8
  Bottom Layer w0.152: v1(58.4,17.05) 64.6,23.25 65.5,23.25 66.9,24.65 66.9,26.45 v1(67,26.55) ; v1(69.7,32.25) 85.1,47.65 v1(110.6,47.65)
NetU2_9: U2.9 U5.42 | length 75
  Top Layer w0.152: U5.42 59.3,16.35 v1(59.4,16.25) ; v1(68,26.55) 68,29.25 v1(70.4,31.65) ; v1(111.6,46.55) U2.9
  Bottom Layer w0.152: v1(59.4,16.25) 68,24.85 v1(68,26.55) ; v1(70.4,31.65) 85.3,46.55 v1(111.6,46.55)
NetU5_8: U5.8 U14.3 | length 127.9
  Top Layer w0.152: U5.8 63.3,11.45 63.75,11 65.225,11 73.475,2.75 114.75,2.75 142,30 142,46.25 143.82,48.07 153.32,48.07 156.54,51.29
NetU5_9: U5.9 U14.2 | length 130.4
  Top Layer w0.152: U5.9 64.1,11.65 64.445,11.305 65.695,11.305 73.945,3.055 114.305,3.055 141,29.75 141,48.25 142.36,49.61 153.61,49.61 157.83,53.83
NetU5_26: U5.26 U6.23
NetU5_32: U5.32 U6.22 | length 29
  Top Layer w0.152: U6.22 v1(43.725,41.925)
  Top Layer w0.25: v1(50.525,32.55) 56.925,26.15 57.8,26.15 58.5,25.45 U5.32
  Bottom Layer w0.152: v1(43.725,41.925) 43.725,39.35 v1(50.525,32.55)
NetU5_33: U5.33 U6.21 | length 26.4
  Top Layer w0.25: U6.21 v1(39.975,41.275) ; v1(53.8,27.45) 55.056,27.45 56.758,25.748 57.402,25.748 57.7,25.45 U5.33
  Bottom Layer w0.25: v1(39.975,41.275) 40.016,41.275 53.8,27.491 v1(53.8,27.45)
NetU5_34: U5.34 U6.19 | length 26
  Top Layer w0.152: v1(50.2,30.25) 54.4,26.05 54.4,23.05 54.7,22.75 U5.34
  Top Layer w0.25: U6.19 v1(40.475,39.975)
  Bottom Layer w0.152: v1(40.475,39.975) v1(50.2,30.25)
NetU5_35: U5.35 U6.16 | length 24.3
  Top Layer w0.25: U6.16 39.625,38.025 40.13,37.52 40.13,36.645 v1(46.125,30.65) ; v1(53.025,23.75) 54.825,21.95 U5.35
  Bottom Layer w0.25: v1(46.125,30.65) v1(53.025,23.75)
NetU5_36: U5.36 U6.17 | length 30.4
  Top Layer w0.25: U6.17 40.7,38.675 41.125,38.25 47.9,38.25 49.502,36.648 49.502,26.431 54.784,21.15 U5.36
NetU5_40: U5.40 U6.15
RESET: CON2.5 U5.4 | length 5.5
  Top Layer w0.152: CON2.5 60.1,12.18 U5.4
RESET1: CON1.5 U2.4 | length 12.9
  Top Layer w0.152: v1(104,49) 104,48.59 104.92,47.67 CON1.5 104.79,41.79 CON1.5@104.75,41.75 ; v1(107.5,49) 107.5,50.525 U2.4
  Bottom Layer w0.152: v1(104,49) v1(107.5,49)
SCK: CON2.3 U5.3 | length 11.8
  Top Layer w0.152: CON2.3 57.96,7.5 55.75,7.5 55.25,8 55.25,8.731 56.973,10.454 57.726,10.454 59.029,11.756 59.029,12.654 U5.3
SCK1: CON1.3 U2.3 | length 10
  Top Layer w0.152: U2.3 106.75,50.575 106.75,48.25 108.5,46.5 108.5,42.83 CON1.3
VMOT: C9.1 C10.1 C17.1 C18.1 F2.2 U3.1 U6.13 U6.14 U6.24 | length 81.1
  Top Layer w0.152: 16.5,81.25 18,79.75 ; 19.35,84.1 F2.2 ; 20.75,79.75 21.85,80.85 ; U3.1 U3.1@25,86.75
  Top Layer w0.5: 21.85,80.85 C10.1 C9.1 U3.1@25,86.75 ; 37.45,50.8 37.45,45.55 37.475,45.525 ; U6.14 U6.13 37.975,36.075 37.475,36.575 37.475,45.525 ; U6.24 38.75,44.25 37.475,45.525
  Top Layer w3: 18,79.75 20.75,79.75 ; 19.35,84.1 16.5,81.25 16.5,71.75 37.45,50.8
XTAL1: C13.1 U5.15 XTAL1.1 | length 16.5
  Top Layer w0.152: XTAL1.1@79.4,17.45 83.75,17.45 C13.1
  Top Layer w0.25: U5.15 79.1,17.15 XTAL1.1@79.4,17.45
XTAL2: C14.1 U5.14 XTAL1.2 | length 19.4
  Top Layer w0.152: XTAL1.2@79.4,8.45 C14.1
  Top Layer w0.25: U5.14 71.5,16.35 XTAL1.2@79.4,8.45
XTAL11: C39.1 U2.15 XTAL2.1 | length 13.1
  Top Layer w0.152: U2.15 115.125,54.95 119.1,54.95 121.8,57.65 XTAL2.1 122.6,57.75 C39.1
XTAL21: C40.1 U2.14 XTAL2.2 | length 14.1
  Top Layer w0.152: U2.14 117.1,54.05 XTAL2.2 C40.1
pads on no net: CON12.2 U1.12 U1.20 U2.19 U2.20 U2.21 U2.22 U2.23 U2.24 U2.25 U2.26 U2.27 U2.33 U2.40 U2.41 U2.42 U2.43 U2.44 U5.5 U5.7 U5.10 U5.11 U5.12 U5.13 U5.20 U5.21 U5.22 U5.23 U5.24 U5.25 U5.27 U5.29 U5.30 U5.31 U5.37 U5.43 U5.44 U14.1 U14.4
copper on no net: | length 67.8
  Top Layer w0.152: 38.75,42.575 44.025,42.575 v1(44.2,42.75) ; v1(59.2,27.75) 59.3,27.65 59.3,24.575 ; v1(158.25,55) 164.45,55 ; 166.45,55 166.45,55.101
  Top Layer w0.25: 38.75,37.375 39.275,37.375 39.316,37.335 39.26,37.279 39.452,37.279 39.727,37.004 39.727,36.206 45.879,30.055 46.595,30.055 49.1,27.55 49.1,23.05 51.8,20.35 55.875,20.35
  Bottom Layer w0.152: v1(44.2,42.75) v1(59.2,27.75) ; 87.3,94.15 87.8,93.65 91.2,93.65

## Polygon pours and split planes (outlines as drawn)
GND on Bottom Layer "Top Layer-No Net" (solid, pour order 57): 153.25,102.75 177.25,102.75 177.5,103 177.75,102.75 177.75,0 147,0 146.75,-0.25 146,0.5 146,102.5
GND on Bottom Layer "Top Layer-No Net" (solid, pour order 55): 152.4,63.85 152.55,64 177.75,64 177.75,37.25 176.75,36.25 152.25,36.25
GND on Bottom Layer "Top Layer-No Net" (solid, pour order 53): 5.65,75.05 51.15,75.05 51.25,74.95 51.25,32.25 50.55,32.25 49.9,31.55 47.65,31.55 5.75,31.55 5.75,72.55
GND on Bottom Layer "Top Layer-No Net" (solid, pour order 51): 35,31.25 146.5,31.25 146.5,1.25 35.2,1.25 35.3,1.35 35.3,17.55
GND on Bottom Layer "Top Layer-No Net" (solid, pour order 49): 132.6,63.75 132.7,63.85 152.4,63.85 152.4,36.25 152.3,36.15 132.6,36.15 132.6,63.85
GND on Bottom Layer "Top Layer-No Net" (solid, pour order 47): 89.8,102.85 152.4,102.85 152.4,63.85 132.2,63.85 132.2,36.075 132.1,35.975 58.275,35.975 58.275,36.075 52.1,42.25 52.3,42.45 52.3,63.45 78.2,63.45 78.3,63.35 86,71.05 86,77 89.85,77 89.8,77.05 89.8,102.85
GND on Bottom Layer "Top Layer-No Net" (solid, pour order 45): 54.8,76.95 83.4,76.95 83.4,69.25 77.6,63.45 54.8,63.45
GND on Bottom Layer "Top Layer-No Net" (solid, pour order 43): 54.7,102.85 89.8,102.85 89.8,76.95 54.8,76.95 54.6,77.15
GND on Bottom Layer "Top Layer-No Net" (solid, pour order 41): 53,103.75 54,102.75 54,77.05 5.25,77.05 5.25,93.75 0.1,99.45 0,99.55 0,103.75

## Keep-outs
Keep-Out Layer:
  lines w0.254: 5.2,31.15 5.3,31.25 ; 152.3,1.25 152.4,1.35 ; -0.5,99.5 -0.5,103.75 176.9,103.75 177.8,102.85 177.8,0 0,0 0,31.25 0.25,31.5 4.75,31.5 5.1,31.85 5.1,66.75 0,66.75 -0.25,67 -0.25,75 5.25,75 5.25,93.75 -0.5,99.5

## Silkscreen, mask and mechanical layers (free items; w line width, h text height)
Top Overlay:
  circle w1: c113.96,43.75 r0.5
  circle w1: c65.75,10.75 r0.5
  lines w0.254: 5.1,66.75 50.7,66.75 ; 5.3,31.25 49.7,31.25 50.9,32.45 50.9,66.95 ; 16.05,77 54.05,77 ; 35.2,1.25 35.2,1.95 35.2,31.25 ; 50.8,43.45 58.275,35.975 146.425,35.975 146.5,36.05 ; 50.9,63.45 69.4,63.45 ; 53.9,102.85 53.9,77.15 54.05,77 ; 76.55,63.45 77.7,63.45 83.2,68.95 83.4,69.15 ; 83.4,69.25 83.4,77 ; 89.8,102.85 89.8,77.05 89.85,77 54.05,77 ; 132.2,36.075 132.2,63.85 152.4,63.85 177.4,63.85 ; 132.275,36.15 152.4,36.15 177.35,36.15 ; 109.4,21.25 109.4,31.65 110.3,32.55 125.2,32.55 125.5,32.25 125.5,21.45 125.2,21.15 109.5,21.15 109.4,21.25
  text "ANTH>" at 56.4,100.35 h1.52
  text "Desinged by Ben De Lathouwer" at 133.75,93.75 h1.52
  text "+" at 10.5,92.75 h1.52
  text "3BPEI Advanced Pcb" at 133,87.5 h1.52
  text "ESP8266" at 86.6,84.35 h1.52 r90
  text "LEVEL CONVERTOR" at 45.9,70.95 h1.52
  text "MOTOR DRIVER" at 20.2,60.15 h1.52
  text "ATmegaMain+rotary encoders" at 56.6,46.75 h1.52
  text "HC-SR04" at 137.7,38.95 h1.52
  text "RC RECEIVER HERE" at 111.25,24.25 h1.52
  text "Marvin the hackbot" at 3.75,23.75 h1.52
  text "REV 3" at 151.25,21 h1.52
  text "ATmega secondary + rc receiver + HC-SR04 processing" at 91.5,12 h1.52
Mechanical 1:
  lines w0.254: 5.2,31.15 5.3,31.25 ; 152.3,1.25 152.4,1.35 ; -0.5,99.5 -0.5,103.75 176.9,103.75 177.8,102.85 177.8,0 0,0 0,31.25 0.25,31.5 4.75,31.5 5.1,31.85 5.1,66.75 0,66.75 -0.25,67 -0.25,75 5.25,75 5.25,93.75 -0.5,99.5

## Text inside footprints (layer, text, board x,y; h text height)
IC1: Mechanical 13 "ANTENNA AREA" at 64.275,108.284 h0.25; Mechanical 13 "CUTOUT POLYGON" at 64.275,107.776 h0.25